# EAGLE board driverboard-v2 (EAGLE 7.1.0)
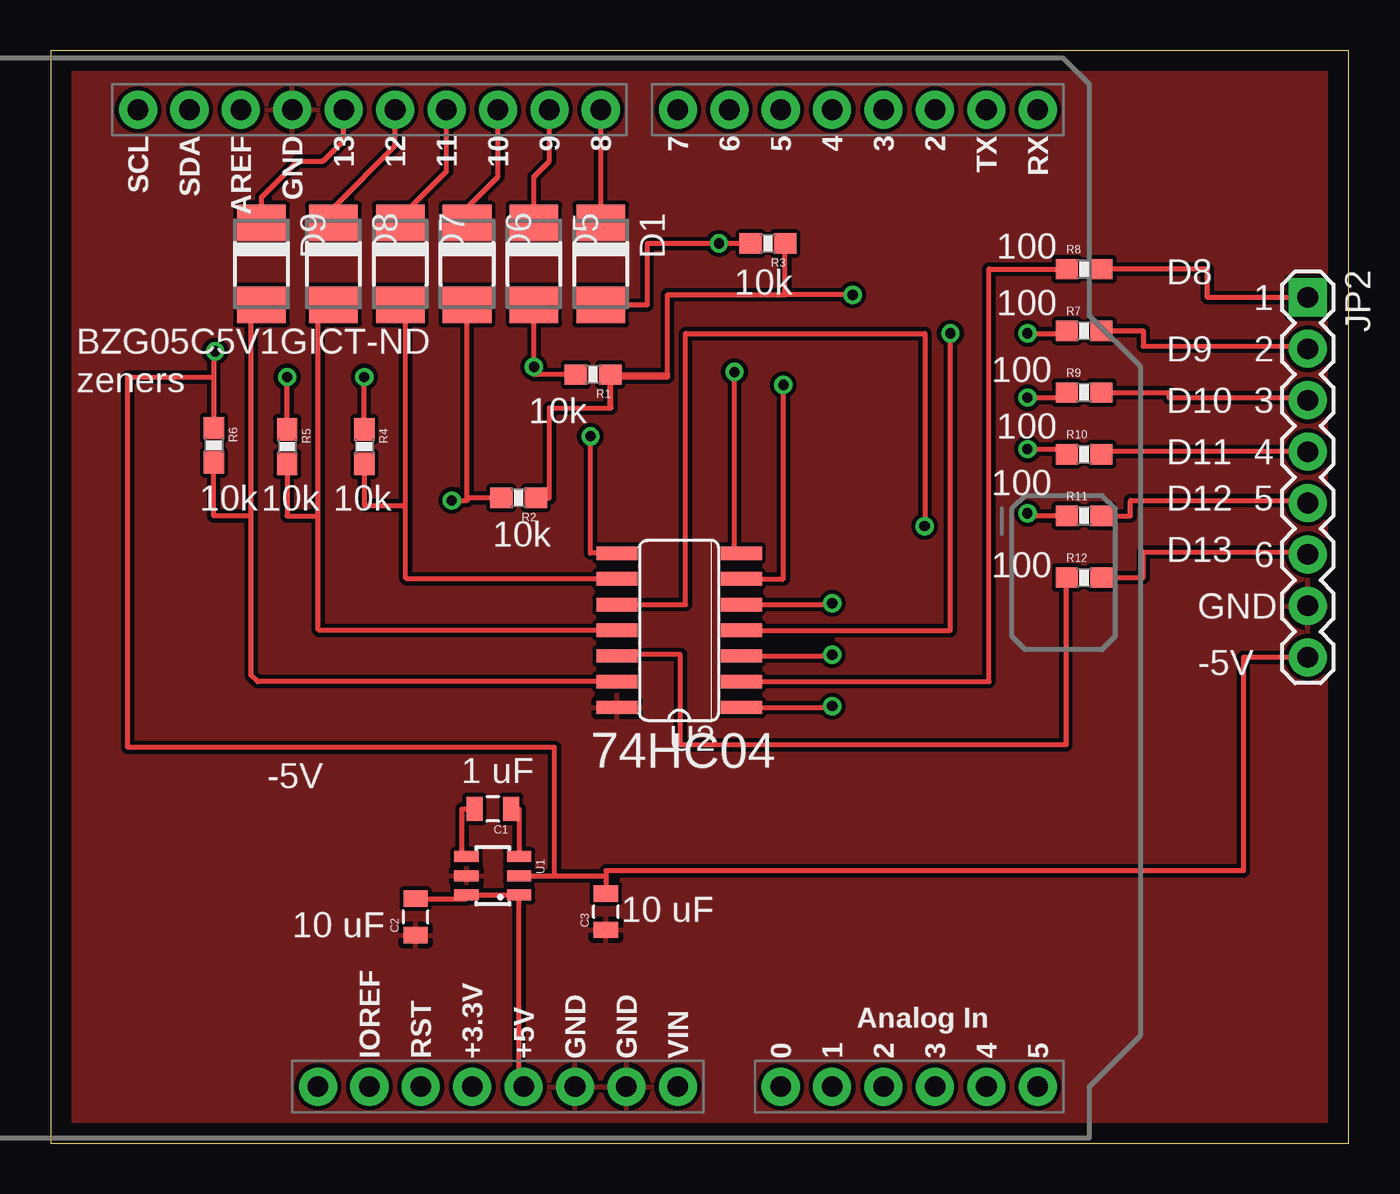
[diagram p0: board, top side]
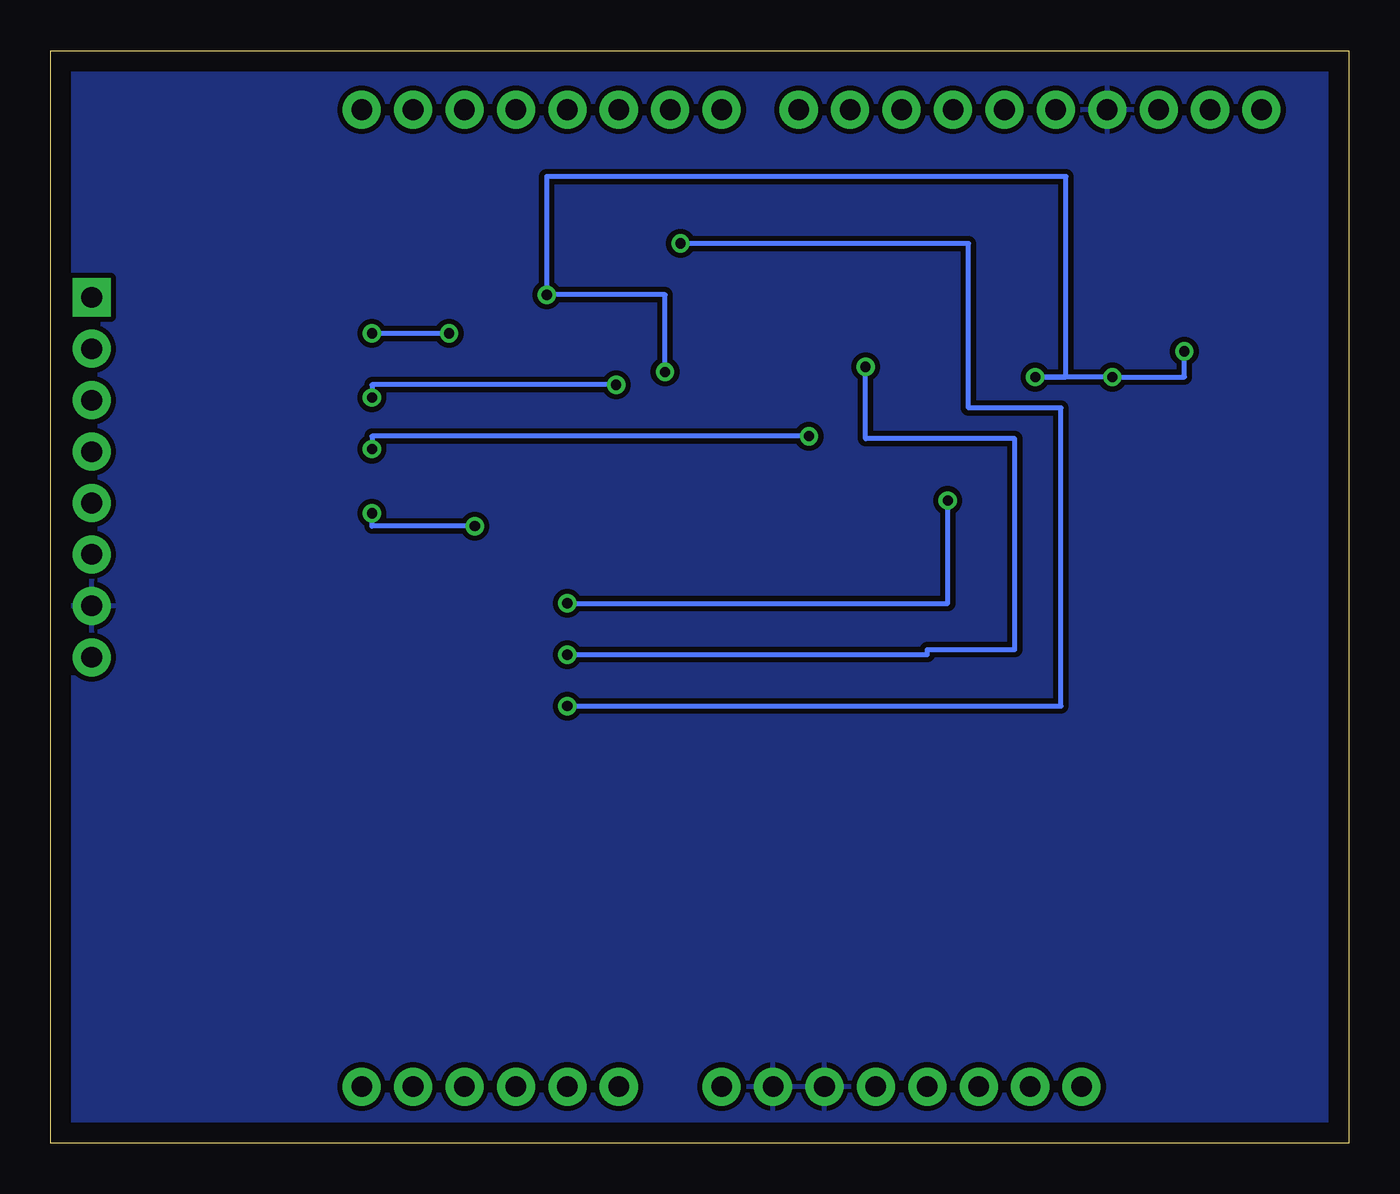
[diagram p1: board, bottom side, seen from below]

Size 64.14 x 53.98 mm. Coordinates in mm from the lower left corner, seen from the top.
Outline: 0,0 64.14,0 64.14,53.98 0,53.98 0,0
Copper layers (1*16): Top 0.035mm / dielectric 1.5mm / Bottom 0.035mm
Design rules "default": minimum track width 10mil, minimum drill 24mil, track to track 8mil, track to pad 8mil, pad to pad 8mil, via to via 8mil, smd to smd 8mil, copper to edge 40mil, drill to drill 8mil, minimum pad ring 10mil, minimum via ring 8mil, stop-mask expansion 4mil, vias tented up to drill 0mil, thermal gap 10mil
Net classes: 1 vcc: width 0.254 mm

## Footprints (pad centres in the part's own frame; a part is rotated, then mirrored left to right if it is on the bottom)
0805 = smd 0.8 x 1.2: 1 -0.9,0; 2 0.9,0
DO-214AC = smd 1.8 x 2.4: A 2.025,0; C -2.025,0
1X08 = drill 1.016 pad 1.88 square: 1 0,0 | drill 1.016 pad 1.88: 2 2.54,0; 3 5.08,0; 4 7.62,0; 5 10.16,0; 6 12.7,0; 7 15.24,0; 8 17.78,0
0603-RES = smd 1.1 x 1: 1 -0.85,0; 2 0.85,0
SSOT23-6 = smd 0.55 x 1.2: 1 0.95,1.3; 2 0,1.3; 3 -0.95,1.3; 4 -0.95,-1.3; 5 0,-1.3; 6 0.95,-1.3
SO14 = smd 0.66 x 2.032: 1 -3.81,-3.073; 2 -2.54,-3.073; 3 -1.27,-3.073; 4 0,-3.073; 5 1.27,-3.073; 6 2.54,-3.073; 7 3.81,-3.073; 8 3.81,3.073; 9 2.54,3.073; 10 1.27,3.073; 11 0,3.073; 12 -1.27,3.073; 13 -2.54,3.073; 14 -3.81,3.073
UNO_R3_SHIELD = drill 1.016 pad 1.88: 3.3V 50.8,26.67; 5V 50.8,29.21; A0 50.8,41.91; A1 50.8,44.45; A2 50.8,46.99; A3 50.8,49.53; A4 50.8,52.07; A5 50.8,54.61; AREF 2.54,15.24; D2 2.54,49.53; D3 2.54,46.99; D4 2.54,44.45; D5 2.54,41.91; D6 2.54,39.37; D7 2.54,36.83; D8 2.54,33.02; D9 2.54,30.48; D10 2.54,27.94; D11 2.54,25.4; D12 2.54,22.86; D13 2.54,20.32; GND@0 50.8,31.75; GND@1 50.8,34.29; GND@2 2.54,17.78; IOREF 50.8,21.59; NC 50.8,19.05; RES 50.8,24.13; RX 2.54,54.61; SCL 2.54,10.16; SDA 2.54,12.7; TX 2.54,52.07; VIN 50.8,36.83

## Placement (x,y rotation side)
C1  1 uF  [0805]  21.84,16.51 180 top
C2  10 uF  [0805]  18.03,11.18 90 top
C3  10 uF  [0805]  27.43,11.43 90 top
D1  [DO-214AC]  27.18,43.43 270 top
D5  [DO-214AC]  23.88,43.43 270 top
D6  [DO-214AC]  20.57,43.43 270 top
D7  [DO-214AC]  17.27,43.43 270 top
D8  [DO-214AC]  13.97,43.43 270 top
D9  [DO-214AC]  10.41,43.43 270 top
JP2  [1X08]  62.1,41.78 270 top
R1  10k  [0603-RES]  26.8,37.97 180 top
R2  10k  [0603-RES]  23.11,31.88 180 top
R3  10k  [0603-RES]  35.43,44.45 180 top
R4  10k  [0603-RES]  15.49,34.42 270 top
R5  10k  [0603-RES]  11.68,34.42 270 top
R6  10k  [0603-RES]  8.06,34.48 270 top
R7  100  [0603-RES]  51.05,40.13 0 top
R8  100  [0603-RES]  51.05,43.18 0 top
R9  100  [0603-RES]  51.05,37.08 0 top
R10  100  [0603-RES]  51.05,34.04 0 top
R11  100  [0603-RES]  51.05,30.99 0 top
R12  100  [0603-RES]  51.05,27.94 0 top
U1  LTC1983  [SSOT23-6]  21.84,13.21 270 top
U2  74ALS04D  [SO14]  31.05,25.34 90 top
U$1  ARDUINO_R3_SHIELD  [UNO_R3_SHIELD]  -5.84,53.59 270 top

## Library data of the parts
C1-C3 = SparkFun-Capacitors
D1 D5-D9 = diode
JP2 = SparkFun-Connectors
R1-R12 = SparkFun-Resistors
U1 = spietz-library
U2 = 74xx-us
U$1 = SparkFun-Boards

## Nets
+5V: C2.2 U1.1 U1.6 U$1.5V
GND: C3.2 JP2.8 R1.1 R2.1 R3.1 R4.1 R5.1 R6.1 U1.2 U2.7
N$2: D5.C U$1.D9
N$3: JP2.1 R8.2
N$4: D1.C U$1.D8
N$10: D6.C U$1.D10
N$11: D7.C U$1.D11
N$13: D8.C U$1.D12
N$14: D9.C U$1.D13
N$15: D1.A R3.2 U2.1
N$16: D5.A R1.2 U2.3
N$17: JP2.2 R7.2
N$18: D7.A R4.2 U2.9
N$19: JP2.3 R9.2
N$20: JP2.4 R10.2
N$21: R12.1 U2.12
N$22: R11.1 U2.10
N$23: R10.1 U2.8
N$24: R9.1 U2.6
N$25: R7.1 U2.4
N$26: R8.1 U2.2
N$28: D6.A R2.2 U2.5
N$29: JP2.5 R11.2
N$30: D8.A R5.2 U2.11
N$31: D9.A R6.2 U2.13
N$32: JP2.6 R12.2
N$33: C1.2 U1.4
N$34: C1.1 U1.3
VCC: C2.1 C3.1 JP2.7 U1.5 U2.14 U$1.GND@0 U$1.GND@1 U$1.GND@2

## Tracks (layer width: path | path; a pad name or v marks a point on that pad's centre or on a via)
+5V
  Top 0.254: U$1.5V 23.14,2.79 U1.1 U1.6 20.54,12.08 C2.2
GND  (via drill 0.5)
  Top 0.254: 27.43,13.21 U1.2 24.89,13.21 24.89,19.56 3.81,19.56 3.81,37.85 8.06,37.85 | 27.43,13.21 27.43,12.95 C3.2 | 8.06,37.85 R6.1 | R5.1 v11.68,37.85 | v8.13,39.12 8.06,39.12 8.06,37.85 | R4.1 v15.49,37.85 | 27.65,36.32 24.64,36.32 24.64,31.88 R2.1 | 27.65,36.32 R1.1 30.48,37.97 | 30.48,37.97 30.48,41.91 36.28,41.91 | 36.28,41.91 R3.1 | U2.7 33.78,29.15 v33.78,38.1 | v39.62,41.91 36.28,41.91 | 27.65,36.32 27.69,36.32 27.69,37.85 30.48,37.85 30.48,37.97 | JP2.8 58.93,24 58.93,13.46 27.43,13.46 27.43,13.21
  Bottom 0.254: v8.13,39.12 8.13,37.85 v11.68,37.85 v15.49,37.85 13.97,37.85 13.97,47.75 39.62,47.75 v39.62,41.91 33.78,41.91 v33.78,38.1
N$2
  Top 0.254: D5.C 23.88,47.75 24.64,48.51 U$1.D9
N$3
  Top 0.254: JP2.1 57.15,41.78 57.15,43.18 R8.2
N$4
  Top 0.254: U$1.D8 D1.C
N$10
  Top 0.254: D6.C 20.57,46.23 22.1,47.75 U$1.D10
N$11
  Top 0.254: D7.C 17.27,45.72 19.56,48.01 U$1.D11
N$13
  Top 0.254: D8.C 13.97,46.23 17.02,49.28 U$1.D12
N$14
  Top 0.254: D9.C 10.41,46.74 12.19,48.51 13.46,48.51 14.48,49.53 U$1.D13
N$15  (via drill 0.5)
  Top 0.254: U2.1 38.61,21.53 v38.61,21.59 | D1.A 29.46,41.4 29.46,44.45 v33.02,44.45 R3.2
  Bottom 0.254: v38.61,21.59 14.22,21.59 14.22,36.32 18.8,36.32 18.8,44.45 v33.02,44.45
N$16  (via drill 0.5)
  Top 0.254: U2.3 38.61,24.07 v38.61,24.13 | D5.A v23.88,38.35 23.88,37.97 R1.2
  Bottom 0.254: v38.61,24.13 20.83,24.13 20.83,24.38 16.51,24.38 16.51,34.8 23.88,34.8 v23.88,38.35
N$17
  Top 0.254: R7.2 53.98,40.13 53.98,39.37 62.1,39.37 JP2.2
N$18
  Top 0.254: U2.9 17.59,27.88 17.53,27.94 17.53,31.5 | 17.53,31.5 17.53,41.16 D7.A | R4.2 15.49,31.5 17.53,31.5
N$19
  Top 0.254: R9.2 55.25,37.08 55.25,36.83 62.1,36.83 JP2.3
N$20
  Top 0.254: JP2.4 51.9,34.16 R10.2
N$21
  Top 0.254: R12.1 50.17,27.94 50.17,19.68 31.11,19.68 31.11,24.13 27.98,24.13 U2.12
N$22  (via drill 0.5)
  Top 0.254: U2.10 31.37,26.61 31.37,40.01 43.18,40.01 v43.18,30.48 | R11.1 48.26,30.99 v48.26,31.11
  Bottom 0.254: v43.18,30.48 48.26,30.48 v48.26,31.11
N$23  (via drill 0.5)
  Top 0.254: U2.8 26.67,29.15 v26.67,34.93 | v48.26,34.29 50.2,34.29 R10.1
  Bottom 0.254: v26.67,34.93 48.26,34.93 v48.26,34.29
N$24  (via drill 0.5)
  Top 0.254: U2.6 36.19,27.88 v36.19,37.47 | v48.26,36.83 50.2,36.83 R9.1
  Bottom 0.254: v36.19,37.47 48.26,37.47 v48.26,36.83
N$25  (via drill 0.5)
  Top 0.254: U2.4 44.45,25.34 v44.45,40.01 | v48.26,40.01 50.2,40.01 R7.1
  Bottom 0.254: v44.45,40.01 v48.26,40.01
N$26
  Top 0.254: U2.2 46.36,22.8 46.36,43.18 R8.1
N$28  (via drill 0.5)
  Top 0.254: U2.5 38.61,26.61 v38.61,26.67 | v19.81,31.75 20.57,31.75 20.57,31.88 | 20.57,31.88 D6.A | R2.2 20.57,31.88
  Bottom 0.254: v38.61,26.67 19.81,26.67 v19.81,31.75
N$29
  Top 0.254: R11.2 53.34,30.99 53.34,31.75 62.1,31.75 JP2.5
N$30
  Top 0.254: U2.11 13.27,25.34 13.21,25.4 13.21,30.99 | 13.21,30.99 13.21,40.65 D8.A | R5.2 11.68,30.99 13.21,30.99
N$31
  Top 0.254: U2.13 10.22,22.8 9.91,23.11 9.91,30.99 | 9.91,30.99 9.91,40.9 D9.A | 9.91,30.99 8.06,30.99 R6.2
N$32
  Top 0.254: R12.2 53.98,27.94 53.98,29.21 62.1,29.21 JP2.6
N$33
  Top 0.254: U1.4 20.32,14.16 20.32,16.51 C1.2
N$34
  Top 0.254: C1.1 23.14,16.51 U1.3
VCC
  pour Top (isolate 0.152): -16.51,57.91 -16.51,-2.54 74.68,-2.54 74.68,58.17
  pour Bottom (isolate 0.254): -17.78,61.09 -17.78,-6.35 75.44,-6.35 75.44,61.09

## Text on the board
tPlace: 100 | 10k | D8 | 100 | 1 | D9 | 2 | BZG05C5V1GICT-ND / zeners | 100 | D10 | 3 | 10k | 100 | D11 | 4 | 100 | 10k | 10k | 10k | D12 | 5 | 10k | 100 | D13 | 6 | GND | -5V | 74HC04 | -5V | 1 uF | 10 uF | 10 uF